# Altium PCB accessoryidk.PcbDoc
Units mm, origin at the board's own origin, x right, y up, seen from the top; angles counter-clockwise.
Board outline 96.5 x 79 mm, 4 copper layers (F.Cu, In1.Cu, In2.Cu, B.Cu); 81 components, 162 nets, 413 pads, 97 vias.
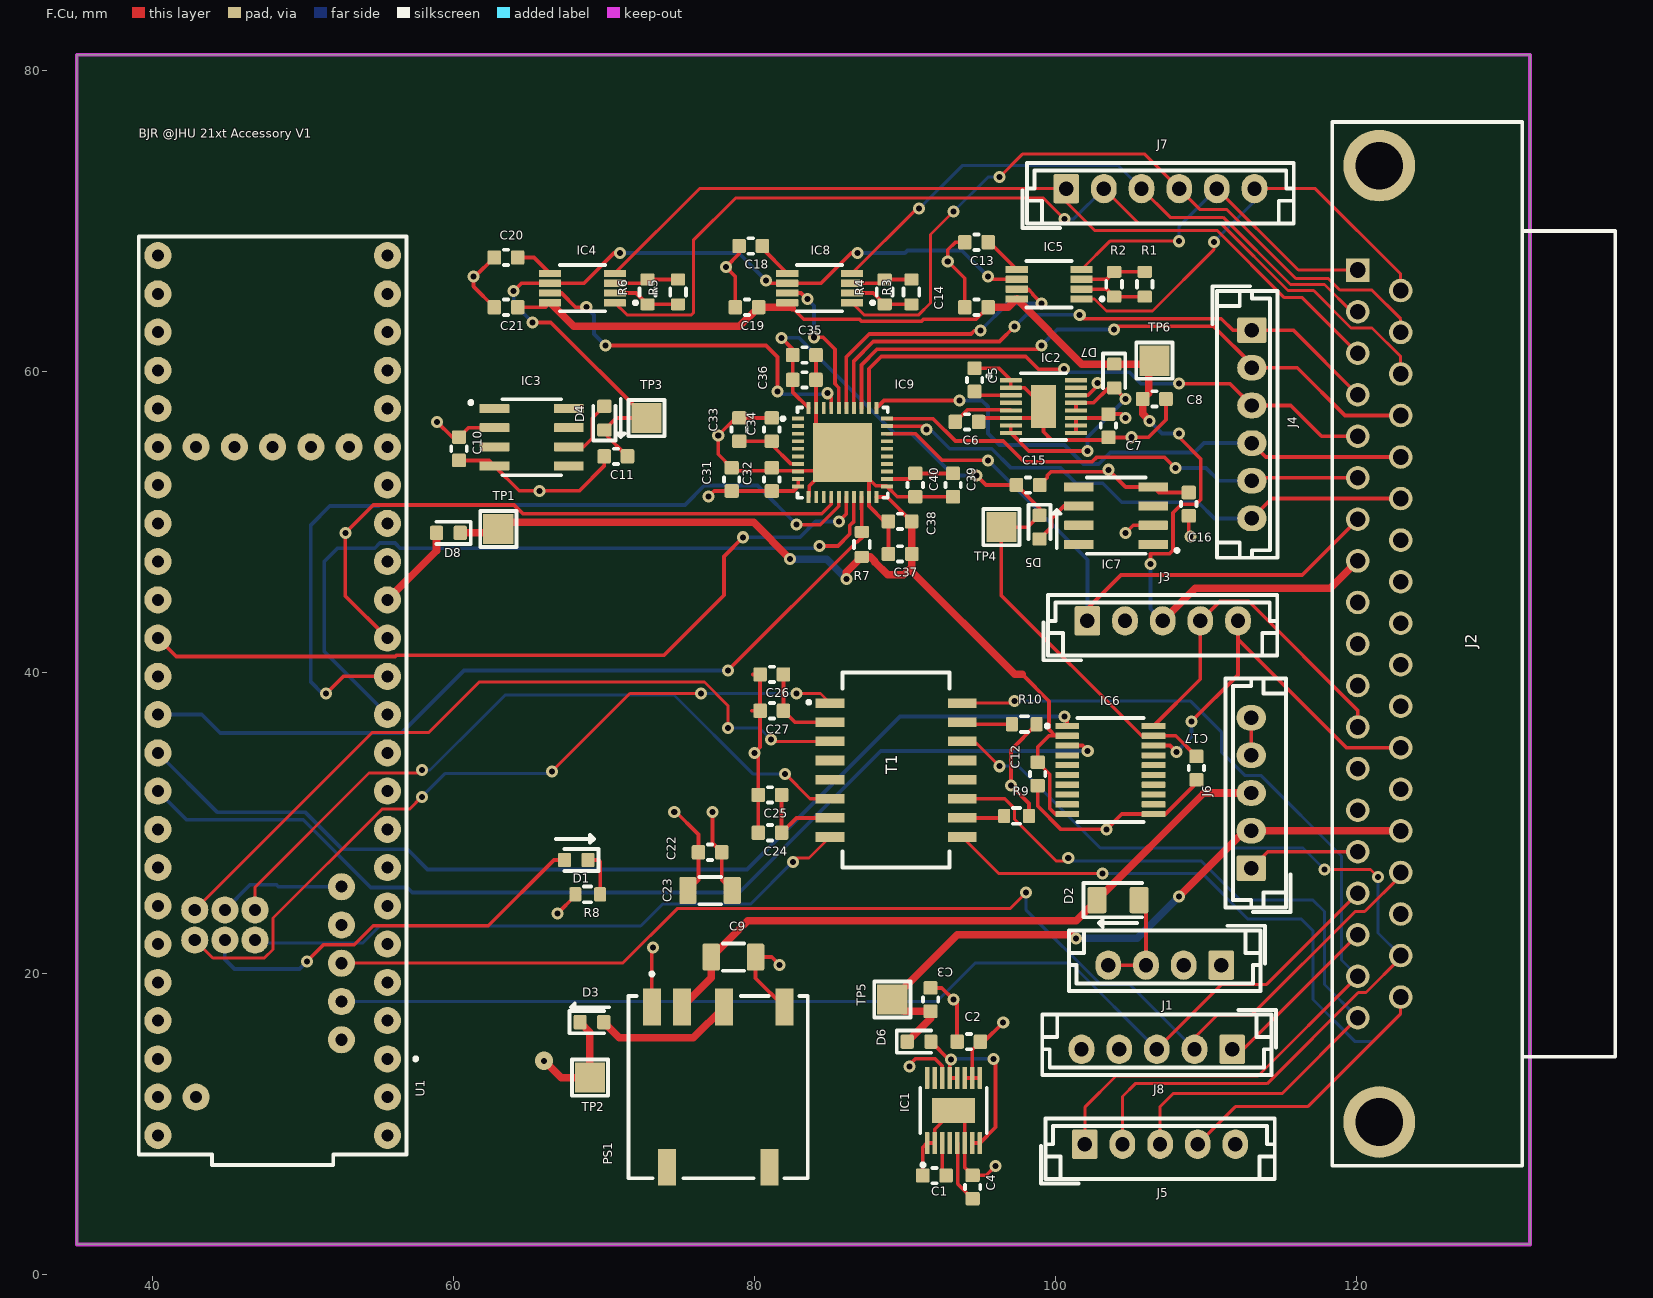
[diagram p0: F.Cu view]
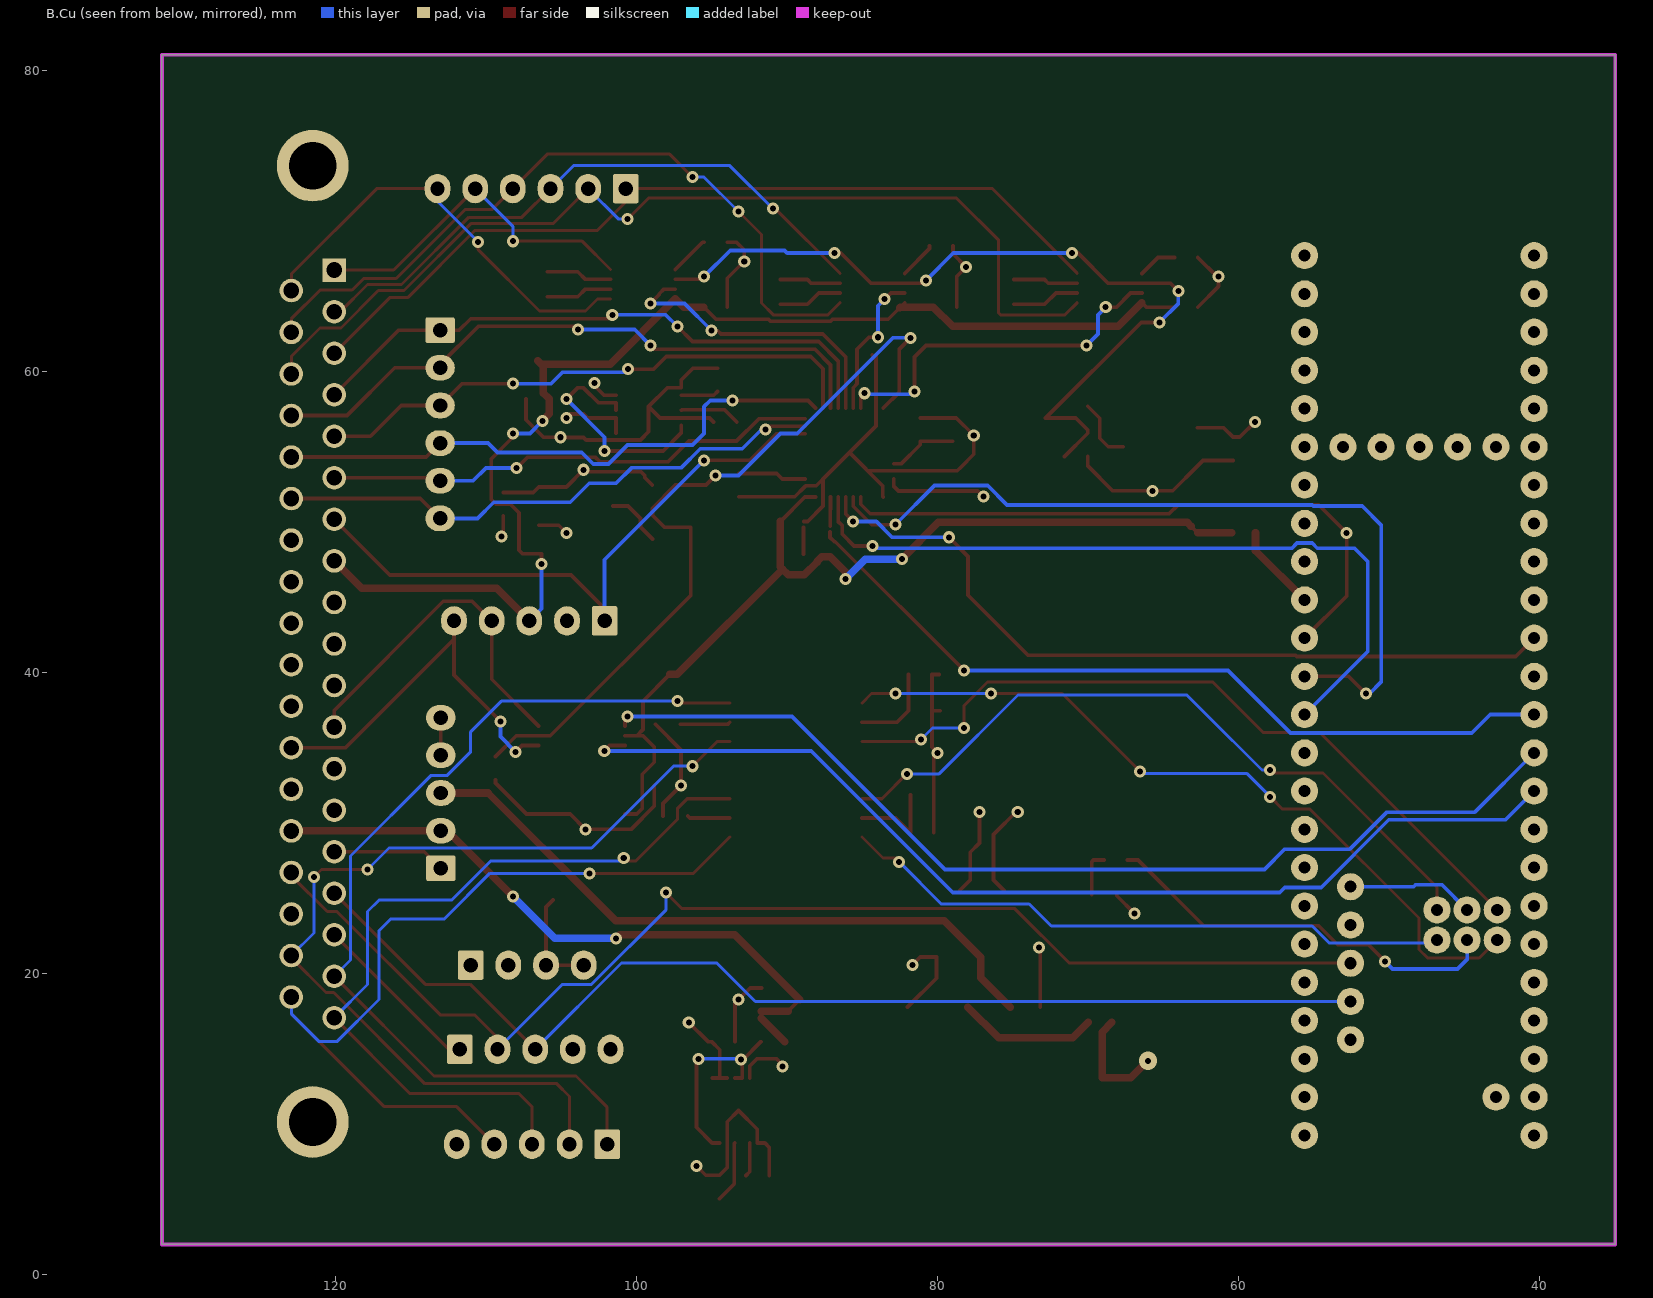
[diagram p1: B.Cu view, seen from below]
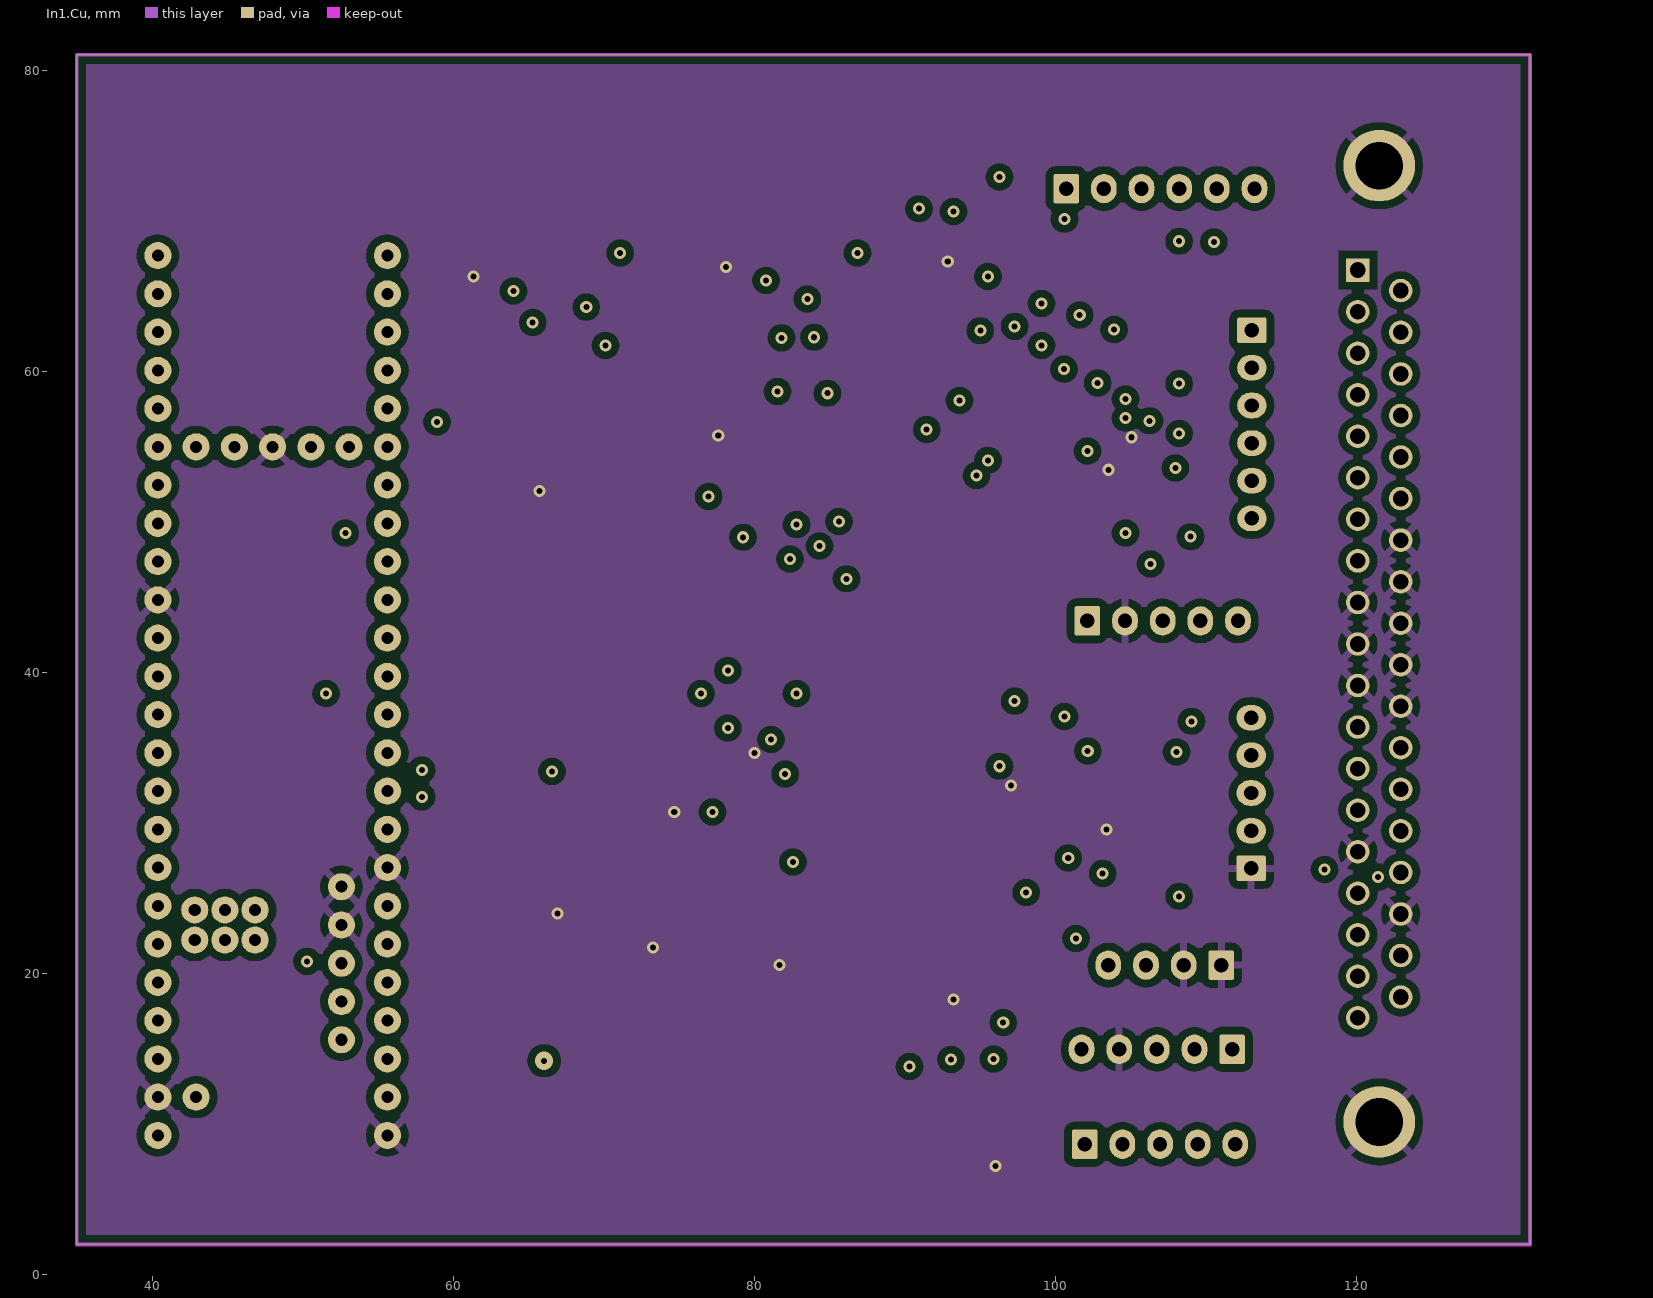
[diagram p2: In1.Cu]
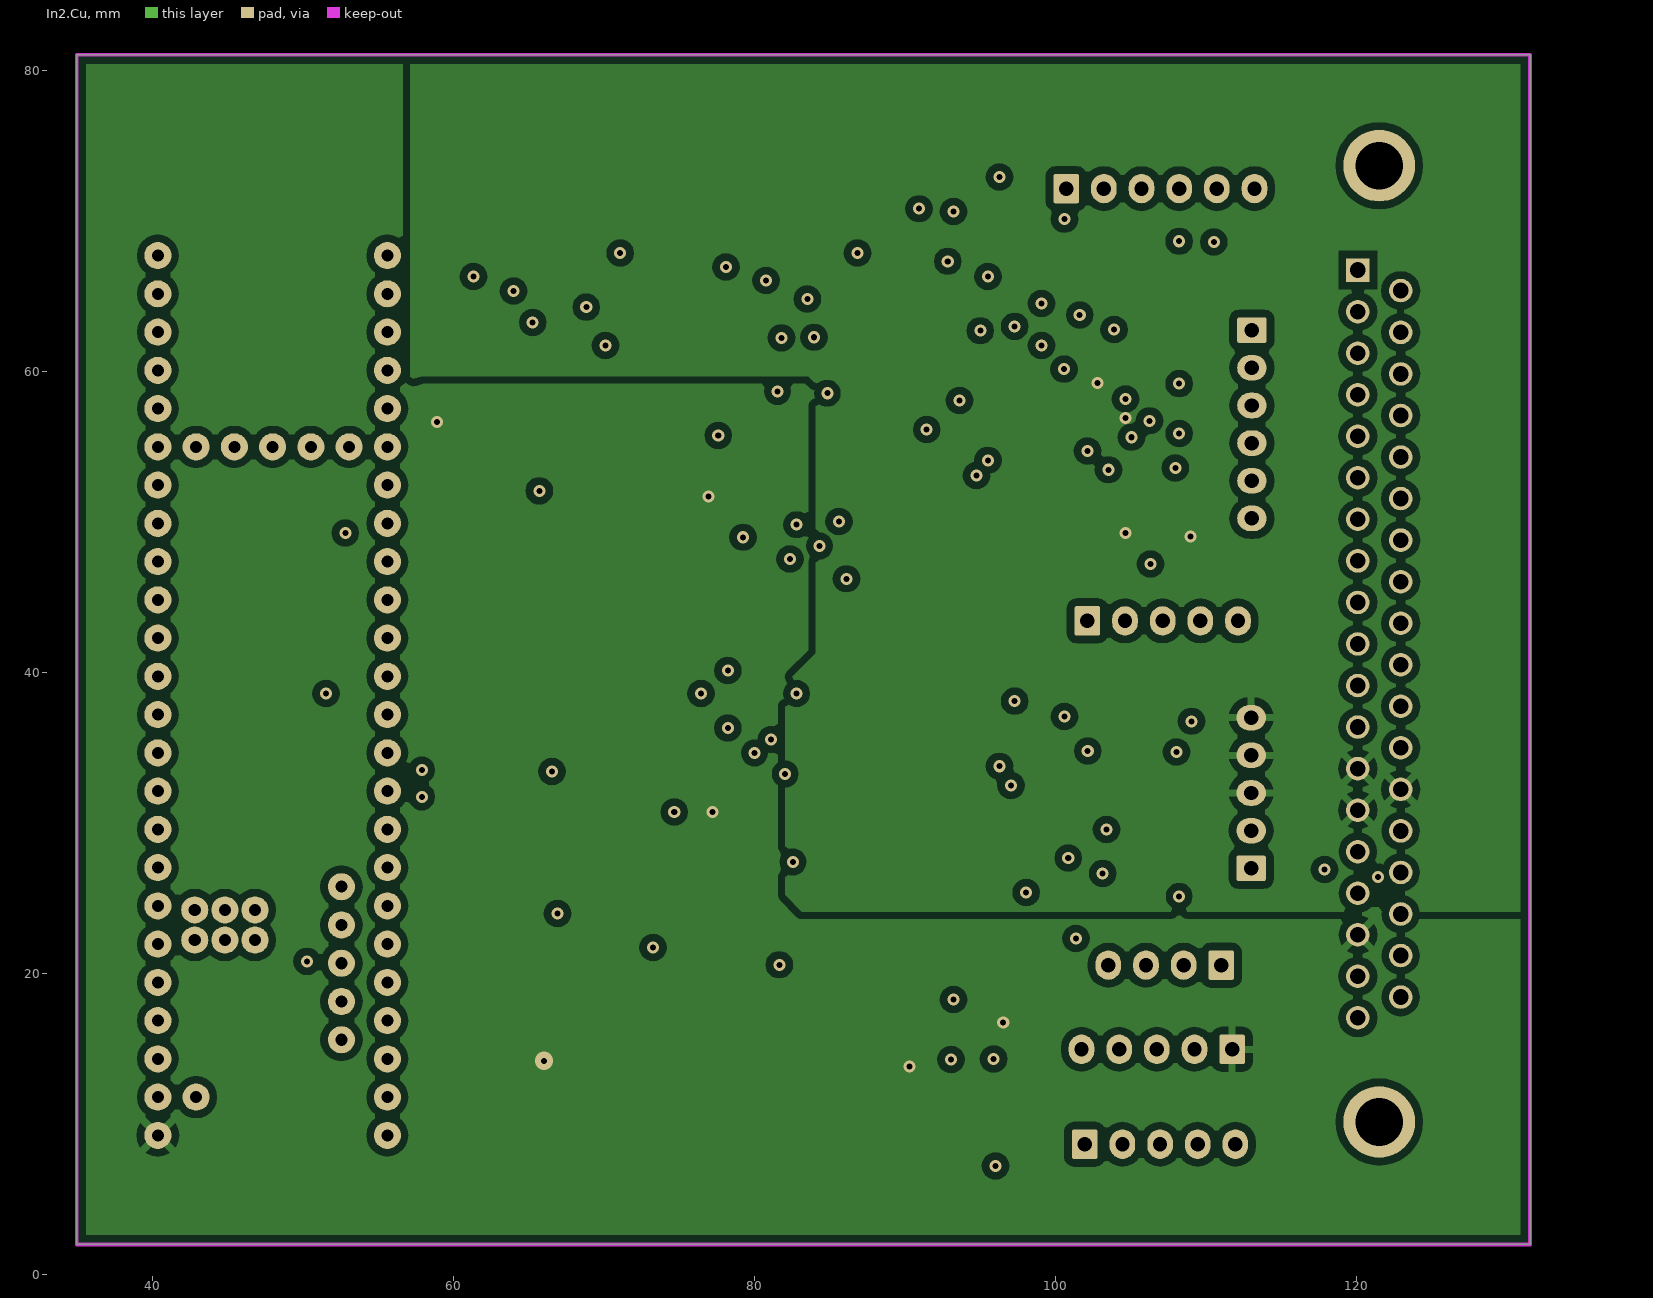
[diagram p3: In2.Cu]

## Layer stack, top to bottom
F.Mask: solder mask 0.0102, Solder Resist, Dk 3.5
F.Cu: signal copper 0.0356
Dielectric 1: dielectric 0.32, FR-4, Dk 4.8
In1.Cu: signal copper 0.0356
Dielectric2: dielectric 0.32, FR-4, Dk 4.8
In2.Cu: signal copper 0.0356
Dielectric3: dielectric 0.32, FR-4, Dk 4.8
B.Cu: signal copper 0.0356
B.Mask: solder mask 0.0102, Solder Resist, Dk 3.5

## Board outline
35,81.026 35,2.026 131.5,2.026 131.5,81.026 35,81.026

## Design rules (kind name [scope] priority, off if disabled: settings)
Clearance "Clearence 0.5_Polygon" [InNamedPolygon('In1.Cu-usb_gnd') OR InNamedPolygon('In2.Cu-5v_buck') OR InNamedPolygon('In2.Cu-12v')] p1: gap=0.5 ignorepadtopadclearanceinfootprint=FALSE
MinimumSolderMaskSliver [All] p1: minsoldermaskwidth=0
PolygonConnect Polygon_In2.Cu-12v_ConnectDirect [IsNamedPolygon('In2.Cu-12v') vs IsVia] p1: connectstyle=Direct reliefconductorwidth=0.254 reliefentries=4 polygonreliefangle="90 Angle" airgapwidth=0.254
PolygonConnect Polygon_In2.Cu-12v_ConnectRelief45 [IsNamedPolygon('In2.Cu-12v') vs (IsThruPin or IsSMTPin) and (PadShape_AllLayers = 'Round')] p2: connectstyle=Relief reliefconductorwidth=0.5 reliefentries=4 polygonreliefangle="45 Angle" airgapwidth=0.5
PolygonConnect Polygon_In2.Cu-12v_ConnectRelief90 [IsNamedPolygon('In2.Cu-12v') vs (IsThruPin or IsSMTPin) and (PadShape_AllLayers <> 'Round')] p3: connectstyle=Relief reliefconductorwidth=0.5 reliefentries=4 polygonreliefangle="90 Angle" airgapwidth=0.5
PolygonConnect Polygon_In2.Cu-5v_buck_ConnectDirect [IsNamedPolygon('In2.Cu-5v_buck') vs IsVia] p4: connectstyle=Direct reliefconductorwidth=0.254 reliefentries=4 polygonreliefangle="90 Angle" airgapwidth=0.254
PolygonConnect Polygon_In2.Cu-5v_buck_ConnectRelief45 [IsNamedPolygon('In2.Cu-5v_buck') vs (IsThruPin or IsSMTPin) and (PadShape_AllLayers = 'Round')] p5: connectstyle=Relief reliefconductorwidth=0.5 reliefentries=4 polygonreliefangle="45 Angle" airgapwidth=0.5
PolygonConnect Polygon_In2.Cu-5v_buck_ConnectRelief90 [IsNamedPolygon('In2.Cu-5v_buck') vs (IsThruPin or IsSMTPin) and (PadShape_AllLayers <> 'Round')] p6: connectstyle=Relief reliefconductorwidth=0.5 reliefentries=4 polygonreliefangle="90 Angle" airgapwidth=0.5
PolygonConnect Polygon_In1.Cu-usb_gnd_ConnectDirect [IsNamedPolygon('In1.Cu-usb_gnd') vs IsVia] p7: connectstyle=Direct reliefconductorwidth=0.254 reliefentries=4 polygonreliefangle="90 Angle" airgapwidth=0.254
PolygonConnect Polygon_In1.Cu-usb_gnd_ConnectRelief45 [IsNamedPolygon('In1.Cu-usb_gnd') vs (IsThruPin or IsSMTPin) and (PadShape_AllLayers = 'Round')] p8: connectstyle=Relief reliefconductorwidth=0.5 reliefentries=4 polygonreliefangle="45 Angle" airgapwidth=0.5
PolygonConnect Polygon_In1.Cu-usb_gnd_ConnectRelief90 [IsNamedPolygon('In1.Cu-usb_gnd') vs (IsThruPin or IsSMTPin) and (PadShape_AllLayers <> 'Round')] p9: connectstyle=Relief reliefconductorwidth=0.5 reliefentries=4 polygonreliefangle="90 Angle" airgapwidth=0.5
RoutingVias [All] p1: holewidth=0.711 width=1.27 viastyle="Through Hole" minholewidth=0.711 minwidth=1.27 maxholewidth=0.711 maxwidth=1.27
SilkToSilkClearance [All] p1: silktosilkclearance=0
SilkToSolderMaskClearance [IsPad] p1: minsilkscreentomaskgap=0 clearancetoexposedcopper=TRUE
SolderMaskExpansion [All] p1: expansion=0.102 istentingtop=FALSE
Width [All] p1: maxlimit=10 minlimit=0.254 preferedwidth=0.254 minimp=50.000000 maximp=50.000000 favimp=50.000000
27 further rules are at their usual default settings.

## Components (designator, comment, footprint, x,y, rotation, side; value= is the part's Value field where it differs from the comment)
C1 "1u" C_0603_1608Metric 91.948,6.604 r0 top
C2 "0.1u" C_0603_1608Metric 94.234,15.494 r0 top
C3 "1u" C_0603_1608Metric 91.694,18.288 r270 top
C4 "0.1u" C_0603_1608Metric 94.488,5.842 r270 top
C5 "1u" C_0603_1608Metric 94.614,59.44 r270 top
C6 "0.1u" C_0603_1608Metric 94.106,56.646 r180 top
C7 "0.1u" C_0603_1608Metric 103.504,56.392 r90 top
C8 "1u" C_0603_1608Metric 106.552,58.17 r180 top
C9 "10u" C_1206_3216Metric 78.605,21.107 r0 top
C10 "1u" C_0603_1608Metric 60.382,54.864 r270 top
C11 "10u" C_0603_1608Metric 70.796,54.356 r180 top
C12 "0.1u" C_0603_1608Metric 98.806,33.274 r270 top
C13 "1u" C_0603_1608Metric 94.742,68.58 r180 top
C14 "1u" C_0603_1608Metric 94.742,64.262 r180 top
C15 "22u" C_0603_1608Metric 98.171,52.451 r0 top
C16 "1u" C_0603_1608Metric 108.839,51.181 r90 top
C17 "0.1u" C_0603_1608Metric 109.347,33.655 r270 top
C18 "1u" C_0603_1608Metric 79.756,68.326 r180 top
C19 "1u" C_0603_1608Metric 79.502,64.262 r180 top
C20 "1u" C_0603_1608Metric 63.5,67.564 r180 top
C21 "1u" C_0603_1608Metric 63.5,64.262 r180 top
C22 "0.1u" C_0603_1608Metric 77.058,28.067 r0 top
C23 "100u" C_1206_3216Metric 77.058,25.527 r0 top
C24 "0.1u" C_0603_1608Metric 81.026,29.367 r180 top
C25 "0.1u" C_0603_1608Metric 81.026,31.877 r180 top
C26 "0.1u" C_0603_1608Metric 81.153,39.878 r180 top
C27 "0.1u" C_0603_1608Metric 81.153,37.465 r180 top
C31 "10u" C_0603_1608Metric 78.486,52.832 r90 top
C32 "0.1u" C_0603_1608Metric 81.153,52.832 r90 top
C33 "1u" C_0603_1608Metric 78.994,56.134 r270 top
C34 "0.1u" C_0603_1608Metric 81.153,56.134 r270 top
C35 "10u" C_0603_1608Metric 83.312,61.087 r0 top
C36 "0.1u" C_0603_1608Metric 83.312,59.436 r0 top
C37 "0.1u" C_0603_1608Metric 89.675,47.879 r180 top
C38 "10u" C_0603_1608Metric 89.662,50.038 r180 top
C39 "0.1u" C_0603_1608Metric 93.188,52.451 r270 top
C40 "1u" C_0603_1608Metric 90.678,52.451 r270 top
D1 "LED" D_0603_1608Metric 68.168,27.559 r180 top
D2 "D_Schottky" D_1206_3216Metric 104.14,24.892 r0 top
D3 "D_Schottky" D_0603_1608Metric 69.207,16.789 r0 top
D4 "D_Schottky" D_0603_1608Metric 70.034,56.896 r90 top
D5 "D_Schottky" D_0603_1608Metric 98.933,49.657 r270 top
D6 "D_Schottky" D_0603_1608Metric 90.932,15.494 r0 top
D7 "D_Schottky" D_0603_1608Metric 103.886,59.694 r270 top
D8 "D_Schottky" D_0603_1608Metric 59.677,49.276 r180 top
IC1 "LT6658AHMSE-2.5#PBF" SOP50P490X110-17N 93.218,10.922 r90 top
IC2 "LT6658AHMSE-5#PBF" SOP50P490X110-17N 99.186,57.662 r0 top
IC3 "REF5025AIDR" SOIC127P599X175-8N 65.208,55.626 r0 top
IC4 "INA821IDGKT" SOP65P490X110-8N 68.58,65.532 r180 top
IC5 "INA821IDGKT" SOP65P490X110-8N 99.568,65.786 r180 top
IC6 "TXB0108PWR" SOP65P640X120-20N 103.632,33.528 r0 top
IC7 "REF5050IDR" SOIC127P599X175-8N 104.013,50.419 r180 top
IC8 "INA821IDGKT" SOP65P490X110-8N 84.328,65.532 r180 top
IC9 "AD7175-8BCPZ-RL7" QFN50P600X600X80-41N 85.852,54.61 r0 top
J1 "Conn_01x04" JST_EH_B4B-EH-A_1x04_P2.50mm_Vertical 110.998,20.574 r180 top
J2 "5747847-6" 57478476 120.066,66.726 r90 top
J3 "Conn_01x05" JST_EH_B5B-EH-A_1x05_P2.50mm_Vertical 102.108,43.434 r0 top
J4 "Conn_01x06" JST_EH_B6B-EH-A_1x06_P2.50mm_Vertical 113.03,62.738 r270 top
J5 "Conn_01x05" JST_EH_B5B-EH-A_1x05_P2.50mm_Vertical 101.934,8.682 r0 top
J6 "Conn_01x05" JST_EH_B5B-EH-A_1x05_P2.50mm_Vertical 112.984,27.004 r90 top
J7 "Conn_01x06" JST_EH_B6B-EH-A_1x06_P2.50mm_Vertical 100.704,72.136 r0 top
J8 "Conn_01x05" JST_EH_B5B-EH-A_1x05_P2.50mm_Vertical 111.72,14.986 r180 top
PS1 "TRS_2-1211" CONV_TRS_2-2419 77.589,12.471 r90 top
R1 "249" R_0603_1608Metric 105.918,65.786 r90 top
R2 "R" R_0603_1608Metric 103.886,65.786 r90 top
R3 "R" R_0603_1608Metric 90.424,65.278 r90 top
R4 "249" R_0603_1608Metric 88.646,65.278 r90 top
R5 "R" R_0603_1608Metric 74.93,65.278 r90 top
R6 "249" R_0603_1608Metric 72.898,65.278 r90 top
R7 "10k" R_0603_1608Metric 87.135,48.514 r90 top
R8 "330" R_0603_1608Metric 68.93,25.273 r180 top
R9 "75" R_0603_1608Metric 97.409,30.48 r0 top
R10 "75" R_0603_1608Metric 97.917,36.576 r0 top
T1 "749013011" 749013011 89.408,33.528 r270 top
TP1 "TestPoint" TestPoint_Pad_2.0x2.0mm 62.992,49.53 r0 top
TP2 "TestPoint" TestPoint_Pad_2.0x2.0mm 69.08,13.106 r0 top
TP3 "TestPoint" TestPoint_Pad_2.0x2.0mm 72.828,56.896 r0 top
TP4 "TestPoint" TestPoint_Pad_2.0x2.0mm 96.393,49.657 r0 top
TP5 "TestPoint" TestPoint_Pad_2.0x2.0mm 89.154,18.288 r90 top
TP6 "TestPoint" TestPoint_Pad_2.0x2.0mm 106.552,60.71 r0 top
U1 "DEV-16771" MODULE_DEV-16771 48.006,38.481 r90 top

## Footprints (in the part's own frame and the unit in brackets; to place one, negate y for a bottom-side part, rotate by r counter-clockwise, add the part's x,y. Pads: shape width x height; smd on the part's side, far side on the other; paste and mask are expansions set on the pad)
57478476 [mil]
  rect 61.5x61.5 hole 41 paste-99999 mask+0: 1(0,0)
  round 61.5 hole 41 paste-99999 mask+0: 2(-108.62,0) 3(-217.2,0) 4(-325.83,0) 5(-434.41,0) 6(-543.03,0) 7(-651.61,0) 8(-760.2,0) 9(-868.82,0) 10(-977.4,0) 11(-1086.02,0) 12(-1194.61,0) 13(-1303.23,0) 14(-1411.81,0) 15(-1520.39,0) 16(-1629.02,0) 17(-1737.6,0) 18(-1846.22,0) 19(-1954.8,0) 20(-53.5,-112.01) 21(-162.91,-112.01) 22(-271.5,-112.01) 23(-380.12,-112.01) 24(-488.7,-112.01) 25(-597.32,-112.01) 26(-705.91,-112.01) 27(-814.53,-112.01) 28(-923.11,-112.01) 29(-1031.69,-112.01) 30(-1140.32,-112.01) 31(-1248.9,-112.01) 32(-1357.52,-112.01) 33(-1466.1,-112.01) 34(-1574.72,-112.01) 35(-1683.31,-112.01) 36(-1791.93,-112.01) 37(-1900.51,-112.01)
  round 187.48 hole 125 paste-99999 mask+0: MH1(272.99,-55.98) MH2(-2227.01,-55.98)
  silkscreen extent -2341,-673 387,67
749013011 [mm]
  rect 0.64x1.91 smd mask+0: 1(-4.445,-4.385) 2(-3.175,-4.385) 3(-1.905,-4.385) 4(-0.635,-4.385) 5(0.635,-4.385) 6(1.905,-4.385) 7(3.175,-4.385) 8(4.445,-4.385) 9(4.445,4.385) 10(3.175,4.385) 11(1.905,4.385) 12(0.635,4.385) 13(-0.635,4.385) 14(-1.905,4.385) 15(-3.175,4.385) 16(-4.445,4.385)
  silkscreen extent -6.48,-5.9 6.48,3.55
C_0603_1608Metric [mm]
  rrect25% 0.9x0.95 smd mask+0: 1(-0.775,0) 2(0.775,0)
  silkscreen extent -0.14,-0.51 0.14,0.51
C_1206_3216Metric [mm]
  rrect22% 1.15x1.8 smd mask+0: 1(-1.475,0) 2(1.475,0)
  silkscreen extent -0.71,-0.91 0.71,0.91
CONV_TRS_2-2419 [mm]
  rect 2.44x1.2 smd mask+0.102: 1(5.32,4.4) 2(5.32,2.4) 3(5.32,-0.4) 5(5.32,-4.4) 6(-5.32,3.4) 7(-5.32,-3.4)
  silkscreen extent -6.05,-5.95 7.62,5.95
D_0603_1608Metric [mm]
  rrect25% 0.875x0.95 smd mask+0: 1(-0.787,0) 2(0.787,0)
  silkscreen extent -1.49,-0.73 0.8,0.73
D_1206_3216Metric [mm]
  rrect20% 1.25x1.75 smd mask+0: 1(-1.4,0) 2(1.4,0)
  silkscreen extent -2.28,-1.13 1.6,1.13
JST_EH_B4B-EH-A_1x04_P2.50mm_Vertical [mm]
  rrect15% 1.7x1.95 hole 0.95 paste-2539.97 mask+0: 1(0,0)
  rrect100% 1.7x1.95 hole 0.95 paste-2539.97 mask+0: 2(2.5,0) 3(5,0) 4(7.5,0)
  silkscreen extent -2.91,-2.61 10.11,1.71
JST_EH_B5B-EH-A_1x05_P2.50mm_Vertical [mm]
  rrect15% 1.7x1.95 hole 0.95 paste-2539.97 mask+0: 1(0,0)
  rrect100% 1.7x1.95 hole 0.95 paste-2539.97 mask+0: 2(2.5,0) 3(5,0) 4(7.5,0) 5(10,0)
  silkscreen extent -2.91,-2.61 12.61,1.71
JST_EH_B6B-EH-A_1x06_P2.50mm_Vertical [mm]
  rrect15% 1.7x1.95 hole 0.95 paste-2539.97 mask+0: 1(0,0)
  rrect100% 1.7x1.95 hole 0.95 paste-2539.97 mask+0: 2(2.5,0) 3(5,0) 4(7.5,0) 5(10,0) 6(12.5,0)
  silkscreen extent -2.91,-2.61 15.11,1.71
MODULE_DEV-16771 [mm]
  round 1.8 hole 0.8 paste-2539.97 mask+0.102: 0(-26.67,-7.62) 1(-24.13,-7.62) 2(-21.59,-7.62) 3(-19.05,-7.62) 3.3V_1(6.35,-7.62) 3.3V_2(-24.13,7.62) 3.3V_3(16.51,-2.54) 4(-16.51,-7.62) 5(-13.97,-7.62) 5V(-22.86,-4.57) 6(-11.43,-7.62) 7(-8.89,-7.62) 8(-6.35,-7.62) 9(-3.81,-7.62) 10(-1.27,-7.62) 11(1.27,-7.62) 12(3.81,-7.62) 13(3.81,7.62) 14(1.27,7.62) 15(-1.27,7.62) 16(-3.81,7.62) 17(-6.35,7.62) 18(-8.89,7.62) 19(-11.43,7.62) 20(-13.97,7.62) 21(-16.51,7.62) 22(-19.05,7.62) 23(-21.59,7.62) 24(8.89,-7.62) 25(11.43,-7.62) 26(13.97,-7.62) 27(16.51,-7.62) 28(19.05,-7.62) 29(21.59,-7.62) 30(24.13,-7.62) 31(26.67,-7.62) 32(29.21,-7.62) 33(29.21,7.62) 34(26.67,7.62) 35(24.13,7.62) 36(21.59,7.62) 37(19.05,7.62) 38(16.51,7.62) 39(13.97,7.62) 40(11.43,7.62) 41(8.89,7.62) D+(-17.78,-4.57) D-(-20.32,-4.57) GND1(-29.21,-7.62) GND2(6.35,7.62) GND3(-26.67,7.62) GND4(16.51,0) GND5(-14.24,3.17) LED(-16.24,3.17) ON/OFF(16.51,5.08) PROGRAM(16.51,2.54) R+(-16.24,5.17) R-(-14.24,5.17) T+(-14.24,1.17) T-(-16.24,1.17) USB_GND1(-15.24,-4.57) USB_GND2(-12.7,-4.57) VBAT(16.51,-5.08) VIN(-29.21,7.62) VUSB(-26.67,5.08)
  silkscreen extent -31.18,-9.6 30.48,8.89
QFN50P600X600X80-41N [mm]
  rrect12% 0.81x0.26 smd mask+0.102: 1(-2.95,2.25) 2(-2.95,1.75) 3(-2.95,1.25) 4(-2.95,0.75) 5(-2.95,0.25) 6(-2.95,-0.25) 7(-2.95,-0.75) 8(-2.95,-1.25) 9(-2.95,-1.75) 10(-2.95,-2.25) 21(2.95,-2.25) 22(2.95,-1.75) 23(2.95,-1.25) 24(2.95,-0.75) 25(2.95,-0.25) 26(2.95,0.25) 27(2.95,0.75) 28(2.95,1.25) 29(2.95,1.75) 30(2.95,2.25)
  rrect12% 0.26x0.81 smd mask+0.102: 11(-2.25,-2.95) 12(-1.75,-2.95) 13(-1.25,-2.95) 14(-0.75,-2.95) 15(-0.25,-2.95) 16(0.25,-2.95) 17(0.75,-2.95) 18(1.25,-2.95) 19(1.75,-2.95) 20(2.25,-2.95) 31(2.25,2.95) 32(1.75,2.95) 33(1.25,2.95) 34(0.75,2.95) 35(0.25,2.95) 36(-0.25,2.95) 37(-0.75,2.95) 38(-1.25,2.95) 39(-1.75,2.95) 40(-2.25,2.95)
  rect 3.9x3.9 smd paste-3.9 mask+0.102: 41(0,0)
  silkscreen extent -4.06,-3 3,3
R_0603_1608Metric [mm]
  rrect25% 0.8x0.95 smd mask+0: 1(-0.825,0) 2(0.825,0)
  silkscreen extent -0.24,-0.52 0.24,0.52
SOIC127P599X175-8N [mm]
  rrect12% 1.97x0.6 smd mask+0.102: 1(-2.47,1.905) 2(-2.47,0.635) 3(-2.47,-0.635) 4(-2.47,-1.905) 5(2.47,-1.905) 6(2.47,-0.635) 7(2.47,0.635) 8(2.47,1.905)
  silkscreen extent -4.14,-2.52 1.95,2.52
SOP50P490X110-17N [mm]
  rrect12% 1.45x0.28 smd mask+0.102: 1(-2.16,1.75) 2(-2.16,1.25) 3(-2.16,0.75) 4(-2.16,0.25) 5(-2.16,-0.25) 6(-2.16,-0.75) 7(-2.16,-1.25) 8(-2.16,-1.75) 9(2.16,-1.75) 10(2.16,-1.25) 11(2.16,-0.75) 12(2.16,-0.25) 13(2.16,0.25) 14(2.16,0.75) 15(2.16,1.25) 16(2.16,1.75)
  rect 1.651x2.845 smd paste-2.845 mask+0.102: 17(0,0)
  silkscreen extent -3.71,-2.21 1.5,2.21
SOP65P490X110-8N [mm]
  rrect12% 1.47x0.48 smd mask+0.102: 1(-2.15,0.975) 2(-2.15,0.325) 3(-2.15,-0.325) 4(-2.15,-0.975) 5(2.15,-0.975) 6(2.15,-0.325) 7(2.15,0.325) 8(2.15,0.975)
  silkscreen extent -3.62,-1.54 1.5,1.54
SOP65P640X120-20N [mm]
  rrect12% 1.57x0.41 smd mask+0.102: 1(-2.87,2.925) 2(-2.87,2.275) 3(-2.87,1.625) 4(-2.87,0.975) 5(-2.87,0.325) 6(-2.87,-0.325) 7(-2.87,-0.975) 8(-2.87,-1.625) 9(-2.87,-2.275) 10(-2.87,-2.925) 11(2.87,-2.925) 12(2.87,-2.275) 13(2.87,-1.625) 14(2.87,-0.975) 15(2.87,-0.325) 16(2.87,0.325) 17(2.87,0.975) 18(2.87,1.625) 19(2.87,2.275) 20(2.87,2.925)
  silkscreen extent -4.29,-3.45 2.2,3.45
TestPoint_Pad_2.0x2.0mm [mm]
  rect 2x2 smd paste-2 mask+0: 1(0,0)
  silkscreen extent -1.2,-1.2 1.2,1.2

## Part data
C1 C2 C3 C4 C5 C6 C7 C8 C10 C11 C12 C13 C14 C15 C16 C17 C18 C19 C20 C21 C22 C24 C25 C26 C27 C31 C32 C33 C34 C35 C36 C37 C38 C39 C40: library part C_0603_1608Metric, "Capacitor SMD 0603 (1608 Metric), square (rectangular) end terminal, IPC_7351 nominal, (Body size source: IPC-SM-782 page 76, https://www.pcb-3d.com/wordpress/wp-content/uploads/ipc-sm-782a_amendment_1_and_2.pdf), generated with kicad-footprint-generator", ki_description="Unpolarized capacitor", ki_keywords="cap capacitor"
  C1 C2 C3 C4 C5 C6 C7 C8 C10 C11 C15 C16: Sheetfile=accessoryidk.kicad_sch
  C12 C13 C14 C17 C18 C19 C20 C21: Sheetfile=sensor_input.kicad_sch, Sheetname="input, processing"
  C22 C24 C25 C26 C27: Sheetfile=teensy.kicad_sch, Sheetname="teensy, etc"
  C31 C32 C33 C34 C35 C36 C37 C38 C39 C40: Sheetfile=AD7175-8.kicad_sch, Sheetname=ADC
C9 C23: library part C_1206_3216Metric, "Capacitor SMD 1206 (3216 Metric), square (rectangular) end terminal, IPC_7351 nominal, (Body size source: IPC-SM-782 page 76, https://www.pcb-3d.com/wordpress/wp-content/uploads/ipc-sm-782a_amendment_1_and_2.pdf), generated with kicad-footprint-generator", ki_description="Unpolarized capacitor", ki_keywords="cap capacitor"
  C9: Sheetfile=accessoryidk.kicad_sch
  C23: Sheetfile=teensy.kicad_sch, Sheetname="teensy, etc"
D1 D3 D4 D5 D6 D7 D8: library part D_0603_1608Metric, "Diode SMD 0603 (1608 Metric), square (rectangular) end terminal, IPC_7351 nominal, (Body size source: http://www.tortai-tech.com/upload/download/2011102023233369053.pdf), generated with kicad-footprint-generator"
  D1: Sheetfile=teensy.kicad_sch, Sheetname="teensy, etc", ki_description="Light emitting diode", ki_keywords="LED diode"
  D3 D4 D5 D6 D7: Sheetfile=accessoryidk.kicad_sch, ki_description="Schottky diode", ki_keywords="diode Schottky"
  D8: Sheetfile=teensy.kicad_sch, Sheetname="teensy, etc", ki_description="Schottky diode", ki_keywords="diode Schottky"
D2: library part D_1206_3216Metric, "Diode SMD 1206 (3216 Metric), square (rectangular) end terminal, IPC_7351 nominal, (Body size source: http://www.tortai-tech.com/upload/download/2011102023233369053.pdf), generated with kicad-footprint-generator", Sheetfile=accessoryidk.kicad_sch, ki_description="Schottky diode", ki_keywords="diode Schottky"
IC1 IC2: library part SOP50P490X110-17N, Manufacturer_Name="Analog Devices", Mouser Part Number=584-LT6658AHMSE5PBF, Height=1.1, Mouser Price/Stock=https://www.mouser.co.uk/ProductDetail/Analog-Devices/LT6658AHMSE-5PBF?qs=W0yvOO0ixfFdSUQ4xUcBUw%3D%3D, Sheetfile=accessoryidk.kicad_sch
  IC1: Manufacturer_Part_Number=LT6658AHMSE-2.5#PBF, ki_description="2.5v refulator for Aux"
  IC2: Manufacturer_Part_Number=LT6658AHMSE-5#PBF, ki_description="5v refulator for Aux"
IC3: library part SOIC127P599X175-8N, Manufacturer_Name="Texas Instruments", Manufacturer_Part_Number=REF5050IDR, Mouser Part Number=595-REF5050IDR, Height=1.75, Mouser Price/Stock=https://www.mouser.co.uk/ProductDetail/Texas-Instruments/REF5050IDR?qs=xL7PkI2RoJ6ioxG%2FxfIGUw%3D%3D, Sheetfile=accessoryidk.kicad_sch, ki_description="5v ref for Aux"
IC4 IC5 IC8: library part SOP65P490X110-8N, Manufacturer_Name="Texas Instruments", Mouser Part Number=595-INA821IDGKT, Height=1.1, Manufacturer_Part_Number=INA821IDGKT, Mouser Price/Stock=https://www.mouser.co.uk/ProductDetail/Texas-Instruments/INA821IDGKT?qs=LDGDZb5k%2F%252B8diOW5CeiHfQ%3D%3D, Sheetfile=sensor_input.kicad_sch, Sheetname="input, processing", ki_description="Inst. Amp for Main, wsg"
IC6: library part SOP65P640X120-20N, Manufacturer_Name="Texas Instruments", Mouser Part Number=595-TXB0108PWR, Height=1.2, Manufacturer_Part_Number=TXB0108PWR, Mouser Price/Stock=https://www.mouser.co.uk/ProductDetail/Texas-Instruments/TXB0108PWR?qs=oFXvjAmG9EgEUWGWzOVFCA%3D%3D, Sheetfile=sensor_input.kicad_sch, Sheetname="input, processing", ki_description="Level shifter for Main"
IC7: library part SOIC127P599X175-8N, Manufacturer_Name="Texas Instruments", Mouser Part Number=595-REF5050IDR, Height=1.75, Manufacturer_Part_Number=REF5050IDR, Mouser Price/Stock=https://www.mouser.co.uk/ProductDetail/Texas-Instruments/REF5050IDR?qs=xL7PkI2RoJ6ioxG%2FxfIGUw%3D%3D, Sheetfile=accessoryidk.kicad_sch, ki_description="5v ref for Aux"
IC9: library part QFN50P600X600X80-41N, Manufacturer_Name="Analog Devices", Mouser Part Number=584-AD7175-8BCPZ-RL7, Height=0.8, Manufacturer_Part_Number=AD7175-8BCPZ-RL7, Mouser Price/Stock=https://www.mouser.co.uk/ProductDetail/Analog-Devices/AD7175-8BCPZ-RL7?qs=JeIcUl65ClCxXjl02vXI6Q%3D%3D, Sheetfile=AD7175-8.kicad_sch, Sheetname=ADC, ki_description="8-channel ADC for Main, Aux"
J1: library part JST_EH_B4B-EH-A_1x04_P2.50mm_Vertical, "JST EH series connector, B4B-EH-A (http://www.jst-mfg.com/product/pdf/eng/eEH.pdf), generated with kicad-footprint-generator", Sheetfile=accessoryidk.kicad_sch, ki_description="Generic connector, single row, 01x04, script generated (kicad-library-utils/schlib/autogen/connector/)", ki_keywords=connector
J2: library part 57478476, "5747847-6_1", Manufacturer_Name="TE Connectivity", Mouser Part Number=571-5747847-6, Arrow Part Number=5747847-6, Arrow Price/Stock=https://www.arrow.com/en/products/5747847-6/te-connectivity?region=nac, Height=12.9286, Manufacturer_Part_Number=5747847-6, Mouser Price/Stock=https://www.mouser.co.uk/ProductDetail/TE-Connectivity/5747847-6?qs=DUjmvCJSYRDRvMVFkAFvlQ%3D%3D, Sheetfile=sensor_input.kicad_sch, Sheetname="input, processing", ki_description="Body Features: Mating Feature Material Zinc | Assembly Process Feature Material Copper Alloy | Shell Plating Material Tin over Copper | Connector Profile Standard | Primary Product Color Black | Mating Feature Plating Material Clear Chromate | Configuration Features: Number of Rows 2 | PCB Mount Orientation Right Angle | Number of Positions 37 | Contact Features: Contact Mating Area Plating Material Gold | PCB Contact Termination Area Plating Material Tin | Contact Base Material Phosphor Bronze | Contact Ma"
J3 J5 J6 J8: library part JST_EH_B5B-EH-A_1x05_P2.50mm_Vertical, "JST EH series connector, B5B-EH-A (http://www.jst-mfg.com/product/pdf/eng/eEH.pdf), generated with kicad-footprint-generator", Sheetfile=sensor_input.kicad_sch, Sheetname="input, processing", ki_description="Generic connector, single row, 01x05, script generated (kicad-library-utils/schlib/autogen/connector/)", ki_keywords=connector
J4 J7: library part JST_EH_B6B-EH-A_1x06_P2.50mm_Vertical, "JST EH series connector, B6B-EH-A (http://www.jst-mfg.com/product/pdf/eng/eEH.pdf), generated with kicad-footprint-generator", Sheetfile=sensor_input.kicad_sch, Sheetname="input, processing", ki_description="Generic connector, single row, 01x06, script generated (kicad-library-utils/schlib/autogen/connector/)", ki_keywords=connector
PS1: library part CONV_TRS_2-2419, Manufacturer_Name="Traco Power", Manufacturer_Part_Number="TRS 2-1211", Mouser Part Number=495-TRS2-1211, Height=8, Mouser Price/Stock=https://www.mouser.co.uk/ProductDetail/TRACO-Power/TRS-2-1211?qs=wUXugUrL1qziI%252BEzex2I6g%3D%3D, Sheetfile=accessoryidk.kicad_sch, ki_description="Buck converter 5v for Aux"
R1 R2 R3 R4 R5 R6 R7 R8 R9 R10: library part R_0603_1608Metric, "Resistor SMD 0603 (1608 Metric), square (rectangular) end terminal, IPC_7351 nominal, (Body size source: IPC-SM-782 page 72, https://www.pcb-3d.com/wordpress/wp-content/uploads/ipc-sm-782a_amendment_1_and_2.pdf), generated with kicad-footprint-generator", ki_description=Resistor, ki_keywords="R res resistor"
  R1 R2 R3 R4 R5 R6: Sheetfile=sensor_input.kicad_sch, Sheetname="input, processing"
  R7: Sheetfile=AD7175-8.kicad_sch, Sheetname=ADC
  R8 R9 R10: Sheetfile=teensy.kicad_sch, Sheetname="teensy, etc"
T1: "749013011-3", Manufacturer_Name="Wurth Elektronik", Mouser Part Number=710-749013011, Height=5.33, Manufacturer_Part_Number=749013011, Mouser Price/Stock=https://www.mouser.co.uk/ProductDetail/Wurth-Elektronik/749013011?qs=2sV1BwmkawRYxGj1O9AWzA%3D%3D, Sheetfile=teensy.kicad_sch, Sheetname="teensy, etc", ki_description="Eth. Magnetics for Main, Aux"
TP1 TP2 TP3 TP4 TP5 TP6: library part TestPoint_Pad_2.0x2.0mm, "SMD rectangular pad as test Point, square 2.0mm side length", ki_description="test point", ki_keywords="test point tp"
  TP1: Sheetfile=teensy.kicad_sch, Sheetname="teensy, etc"
  TP2 TP3 TP4 TP5 TP6: Sheetfile=accessoryidk.kicad_sch
U1: library part MODULE_DEV-16771, "teensy 4.1 for Aux", MANUFACTURER="SparkFun Electronics", MAXIMUM_PACKAGE_HEIGHT=4.07mm, PARTREV=4.1, STANDARD="Manufacturer recommendations", Sheetfile=teensy.kicad_sch, Sheetname="teensy, etc", ki_description="teensy 4.1 for Aux"

## Via types
v1: diameter 0.8, hole 0.4, F.Cu to B.Cu, tented both sides, 96 vias
v2: diameter 1.2, hole 0.4, F.Cu to B.Cu, tented both sides, 1 vias

## Nets (pads, with @x,y where several pads share a name; then routed paths per layer and width w, separated by ;. In a path a pad name is that pad's centre, name@x,y a point inside that pad or via, vN(x,y) a via of type N, cw(c..) or ccw(c..) an arc to the next point about the centre after c; other vN are vias at no path point)
2.5v: C3.2 D6.1 J2.33 J6.2 TP5.1 | length 44.1
  F.Cu w0.25: TP5.1 TP5.1@89.929,17.513 ; 91.694,17.043 C3.2 ; J6.2 J6.2@113.001,29.487
  F.Cu w0.5: TP5.1 93.472,22.606 101.092,22.606 v1(101.346,22.352) ; TP5.1@89.929,17.513 C3.2 ; D6.1 91.694,17.043 ; v1(108.204,25.146) 112.562,29.504 J6.2 ; J6.2@113.001,29.487 J2.33
  B.Cu w0.5: v1(101.346,22.352) 105.41,22.352 v1(108.204,25.146)
2.5v_ref: C11.1 D4.1 IC4.6 IC5.6 IC8.6 TP3.1 | length 55.3
  F.Cu w0.25: v1(64.011,65.337) 64.531,65.857 IC4.6 68.679,65.857 70.674,67.852 v1(71.086,67.852) ; v1(65.278,63.246) 66.478,63.246 TP3.1 70.821,56.896 D4.1 70.034,55.893 C11.1 ; v1(80.772,66.04) 80.955,65.857 IC8.6 84.427,65.857 86.422,67.852 v1(86.834,67.852) ; v1(95.504,66.294) 95.687,66.111 IC5.6
  B.Cu w0.25: v1(64.011,65.337) 64.011,64.513 v1(65.278,63.246) ; v1(71.086,67.852) 78.96,67.852 v1(80.772,66.04) ; v1(86.834,67.852) 89.987,67.852 90.17,68.035 93.763,68.035 v1(95.504,66.294)
3V3: C12.1 C37.1 C38.1 D8.1 IC6.2 IC6.10 IC9.20 R7.1 TP1.1 | length 62.8
  F.Cu w0.25: TP1.1@62.738,49.276 TP1.1 TP1.1@63.172,49.71 ; IC9.20 88.815,51.66 C38.1 ; 97.79,39.878 99.568,38.1 99.568,36.212 IC6.2@99.977,35.803 ; IC6.10 99.977,30.603 99.606,30.974 99.606,33.249 C12.1 98.806,35.052 99.557,35.803 IC6.2@99.977,35.803 ; IC6.2 IC6.2@99.977,35.803
  F.Cu w0.5: D8.1 TP1.1@62.738,49.276 ; TP1.1@63.172,49.71 63.433,49.971 79.95,49.971 82.357,47.564 v1(82.357,47.535) ; v1(86.106,46.228) 86.106,46.66 R7.1 87.693,47.689 88,47.382 88,47.343 88.861,46.482 89.916,46.482 90.297,46.863 ; C38.1 90.45,50.025 C37.1 90.45,47.016 90.297,46.863 ; 97.79,39.878 97.282,39.878 90.297,46.863
  B.Cu w0.5: v1(82.357,47.535) 84.799,47.535 v1(86.106,46.228)
5v_buck: C2.2 C10.1 C22.2 C23.2 C31.1 C32.1 D3.1 IC1.9 IC1.10 IC1.11 IC1.14 IC3.2 IC9.9 IC9.10 J2.17 J8.1 TP2.1 U1.VIN | length 45.3
  F.Cu w0.25: v1(58.928,56.642) 59.931,55.639 C10.1 61.004,56.261 IC3.2 ; v1(76.962,51.689) 77.33,52.057 C31.1 C32.1 82.599,52.057 IC9.10 IC9.9 ; v1(77.216,30.734) 77.216,30.861 77.216,28.684 C22.2 77.833,26.227 C23.2 ; v1(90.297,13.843) 90.297,13.97 90.678,14.351 92.004,14.351 92.468,13.887 IC1.14 ; IC1.11 IC1.9 ; IC1.10 94.468,14.953 C2.2 95.25,15.494 v1(96.52,16.764) ; J8.1 112.461,14.986 J2.17
  F.Cu w0.5: v2(66.04,14.224) 67.158,13.106 TP2.1 69.08,16.128 D3.1
5v_ref: C15.1 C17.1 C35.1 C36.1 D5.1 IC6.19 IC9.40 TP4.1 | length 52.5
  F.Cu w0.25: v1(81.788,62.23) 82.537,61.481 C35.1 82.537,58.625 IC9.40 ; v1(94.742,53.086) 95.377,52.451 C15.1 98.933,50.914 D5.1 98.146,49.657 TP4.1 96.393,45.127 105.717,35.803 IC6.19 107.974,35.803 C17.1
  B.Cu w0.25: v1(81.788,62.23) 82.804,62.23 82.965,62.23 89.315,55.88 90.424,55.88 93.218,53.086 v1(94.742,53.086)
5v_reful: C8.2 C14.1 C19.1 C21.1 D7.1 IC4.8 IC5.8 IC8.8 J2.8 J3.3 TP6.1 | length 84.5
  F.Cu w0.25: C21.1 66.135,64.262 IC4.8 ; IC8.8 83.273,63.462 86.972,63.462 87.106,63.328 91.088,63.328 91.222,63.462 94.717,63.462 C14.1 C14.1@95.517,64.148 ; v1(106.299,47.207) 106.299,47.889 107.561,47.889 107.793,48.121 107.793,50.619 108.355,51.181 109.323,51.181 109.639,51.497 109.639,54.191 108.204,55.626 v1(108.204,55.88) ; TP6.1@106.324,60.481 TP6.1
  F.Cu w0.5: IC4.8 67.995,62.992 79.007,62.992 C19.1 82.473,64.262 82.512,64.224 ; C14.1 96.869,64.262 IC5.8 101.748,60.481 103.504,60.481 TP6.1@106.324,60.481 ; v1(106.231,56.719) 105.777,57.173 C8.2 106.172,58.565 106.172,60.33 TP6.1 ; J3.3 109.267,45.593 118.242,45.593 J2.8
  B.Cu w0.25: v1(106.231,56.719) 107.07,55.88 v1(108.204,55.88) ; v1(106.299,47.207) 106.299,44.243 J3.3
12v: C7.2 C9.1 C16.1 D2.1 IC2.9 IC2.10 IC2.11 IC2.14 IC7.2 J2.13 J2.14 J2.32 J6.3 J6.4 J6.5 PS1.2 | length 56.9
  F.Cu w0.25: IC2.9 IC2.11 103.249,56.912 C7.2 104.372,57.167 v1(104.648,56.891) ; IC2.14 102.151,58.412 102.792,59.053 v1(102.792,59.22) ; v1(104.648,49.276) 105.156,49.784 IC7.2 ; C16.1 108.839,49.149 v1(108.966,49.022) ; J6.4 J6.5
  F.Cu w0.5: PS1.2 77.13,19.731 C9.1 79.555,23.532 101.38,23.532 D2.1 109.852,32.004 J6.3
!CS: IC9.17 U1.10 | length 50
  F.Cu w0.25: v1(84.328,48.414) 85.553,48.414 86.335,49.196 86.335,49.762 86.602,50.029 IC9.17
  B.Cu w0.25: U1.10@55.308,37.529 51.435,41.402 51.435,47.371 52.324,48.26 54.783,48.26 55.119,48.596 56.133,48.596 56.469,48.26 84.174,48.26 v1(84.328,48.414)
!ERROR: IC9.18 R7.2 U1.15 | length 55
  F.Cu w0.25: v1(78.232,40.132) 86.788,48.688 86.853,48.688 87.135,48.97 R7.2 ; IC9.18 87.102,50.843 87.122,50.823 R7.2@87.122,49.72
  B.Cu w0.25: U1.15 43.307,37.211 44.532,35.986 56.56,35.986 60.706,40.132 v1(78.232,40.132) v1@78.297,40.132
brakespeed1: IC9.29 J2.25 J4.6 | length 37.5
  F.Cu w0.25: IC9.29 91.215,56.36 v1(91.44,56.135) ; J4.6 114.346,51.554 J2.25
  B.Cu w0.25: v1(91.44,56.135) 91.44,56.388 92.964,54.864 95.758,54.864 97.028,53.594 100.33,53.594 101.346,52.578 103.124,52.578 104.394,51.308 109.474,51.308 110.544,50.238 J4.6
brakespeed2: IC9.28 J2.7 J3.1 | length 42.1
  F.Cu w0.25: IC9.28 90.69,55.86 92.452,54.097 v1(95.499,54.097) ; J3.1 102.108,44.259 104.331,46.482 116.373,46.482 J2.7
  B.Cu w0.25: v1(95.499,54.097) 102.108,47.489 J3.1
hallfx1: IC6.20 J2.12 J3.4 | length 23.4
  F.Cu w0.25: IC6.20 109.608,39.559 J3.4 110.908,44.734 112.82,44.734 120.066,37.487 J2.12
hallfx1_3v3: IC6.1 U1.16 | length 68.3
  F.Cu w0.25: v1(100.584,37.084) 100.762,36.906 IC6.1
  B.Cu w0.25: U1.16 44.323,30.734 50.166,30.734 52.624,28.276 56.941,28.276 58.293,26.924 79.511,26.924 88.138,35.551 88.138,35.56 89.662,37.084 v1(100.584,37.084)
hallfx2: IC6.18 J2.31 J3.5 | length 27.1
  F.Cu w0.25: IC6.18 107.599,35.153 v1(108.015,34.736) ; v1(109.029,36.767) 112.108,39.845 J3.5 112.108,42.209 119.313,35.004 J2.31
  B.Cu w0.25: v1(108.015,34.736) 109.029,35.75 v1(109.029,36.767)
hallfx2_3v3: IC6.3 U1.17 | length 69.9
  F.Cu w0.25: IC6.3 101.78,35.153 v1(102.131,34.802)
  B.Cu w0.25: U1.17 42.291,30.226 50.038,30.226 54.528,25.736 56.941,25.736 57.277,25.4 78.994,25.4 88.392,34.798 102.126,34.798 v1(102.131,34.802)
linpot1: IC9.34 J2.4 J4.1 | length 40.1
  F.Cu w0.25: IC9.34 86.602,60.694 87.884,61.976 96.266,61.976 v1(97.282,62.992) ; v1(101.6,63.754) 101.854,63.5 110.998,63.5 111.76,62.738 J4.1 115.778,62.738 J2.4
  B.Cu w0.25: v1(97.282,62.992) 98.044,63.754 v1(101.6,63.754)
linpot2: IC9.33 J2.23 J4.2 | length 42.3
  F.Cu w0.25: IC9.33 87.102,60.432 88.138,61.468 98.806,61.468 v1(99.06,61.722) ; v1(103.886,62.775) 104.103,62.992 110.49,62.992 113.03,60.452 J4.2 116.038,60.238 119.205,57.071 J2.23
  B.Cu w0.25: v1(99.06,61.722) 100.113,62.775 v1(103.886,62.775)
Net-(D1-A): D1.2 U1.LED | length 27.1
  F.Cu w0.25: v1(50.292,20.828) 51.39,21.926 53.422,21.926 54.692,23.196 62.33,23.196 66.693,27.559 D1.2
  B.Cu w0.25: U1.LED 44.836,20.95 45.466,20.32 49.784,20.32 v1(50.292,20.828)
Net-(D1-K): D1.1 R8.1 | length 3
  F.Cu w0.25: D1.1 69.643,27.559 69.755,27.447 R8.1
Net-(D2-A): D2.2 J1.3 J1.4 | length 7
  F.Cu w0.25: J1.4 J1.3 105.998,24.434 D2.2
Net-(D3-A): D3.2 PS1.3 | length 9.3
  F.Cu w0.5: D3.2 71.035,15.748 75.946,15.748 PS1.3
Net-(D4-A): D4.2 IC3.6 | length 4.2
  F.Cu w0.25: IC3.6 68.663,54.991 69.234,55.562 69.234,56.884 D4.2
Net-(D5-A): D5.2 IC7.6 | length 3.8
  F.Cu w0.25: D5.2 99.733,49.669 99.733,50.229 100.558,51.054 IC7.6
Net-(D6-A): D6.2 IC1.7 IC1.8 IC1.12 IC1.13 | length 12.8
  F.Cu w0.25: D6.2 92.968,14.246 IC1.13 IC1.12 ; IC1.7 IC1.8 96.012,9.806 96.012,13.716 96.012,14.224 v1(95.885,14.351)
  B.Cu w0.25: v1(93.057,14.309) 93.099,14.351 v1(95.885,14.351)
Net-(D7-A): D7.2 IC2.7 IC2.8 IC2.12 IC2.13 | length 15.1
  F.Cu w0.25: IC2.7 IC2.8 98.216,54.722 v1(102.108,54.722) ; IC2.12 IC2.13 102.51,57.912 103.504,58.906 103.908,58.906 v1(104.648,58.166)
  B.Cu w0.25: v1(102.108,54.722) 102.108,55.626 v1(104.648,58.166)
Net-(D8-A): D8.2 U1.3.3V_1 | length 5.8
  F.Cu w0.5: U1.3.3V_1 58.89,48.095 D8.2
Net-(IC1-BYPASS): C1.2 IC1.3 | length 2.3
  F.Cu w0.25: IC1.3 92.468,6.859 C1.2
Net-(IC1-NR): C4.2 IC1.5 | length 4.1
  F.Cu w0.25: IC1.5 93.503,8.727 93.503,6.052 C4.2
Net-(IC2-BYPASS): C5.2 IC2.3 | length 2.5
  F.Cu w0.25: C5.2 94.867,58.412 IC2.3
Net-(IC2-NR): C6.2 IC2.5 | length 4
  F.Cu w0.25: C6.2 94.131,57.446 96.992,57.446 IC2.5
Net-(IC4--VS): C20.1 IC4.5 | length 2.6
  F.Cu w0.25: C20.1 65.373,67.564 IC4.5
Net-(IC4-RG_1): IC4.2 R5.1 R6.1 | length 4.5
  F.Cu w0.25: IC4.2 72.144,65.207 R6.1 R5.1
Net-(IC4-RG_2): IC4.3 R5.2 R6.2 | length 4.3
  F.Cu w0.25: IC4.3 72.652,65.857 R6.2 R5.2
Net-(IC5--VS): C13.1 IC5.5 | length 2.7
  F.Cu w0.25: C13.1 95.599,68.58 IC5.5
Net-(IC5-RG_1): IC5.2 R1.1 R2.1 | length 4.4
  F.Cu w0.25: IC5.2 103.386,65.461 R2.1 R1.1
Net-(IC5-RG_2): IC5.3 R1.2 R2.2 | length 4.4
  F.Cu w0.25: IC5.3 103.386,66.111 R2.2 R1.2
Net-(IC8--VS): C18.1 IC8.5 | length 2.5
  F.Cu w0.25: C18.1 80.531,68.154 IC8.5
Net-(IC8-RG_1): IC8.2 R3.1 R4.1 | length 4.3
  F.Cu w0.25: IC8.2 87.892,65.207 R4.1 R3.1
Net-(IC8-RG_2): IC8.3 R3.2 R4.2 | length 4
  F.Cu w0.25: IC8.3 88.4,65.857 R4.2 R3.2
Net-(IC9-REGCAPA): C33.2 C34.2 IC9.7 | length 4.7
  F.Cu w0.25: C33.2 C34.2 81.153,55.133 82.426,53.86 IC9.7
Net-(IC9-REGCAPD): C39.1 C40.1 IC9.22 | length 4.5
  F.Cu w0.25: IC9.22 90.312,52.86 C40.1 C39.1
Net-(T1-RCT): C26.1 C27.1 T1.2 | length 5.8
  F.Cu w0.25: C26.1 C27.1 82.69,36.703 T1.2
Net-(T1-RXCT): R10.1 T1.15 | length 3.4
  F.Cu w0.25: T1.15 93.92,36.576 R10.1
Net-(T1-TCT): C24.1 C25.1 T1.7 | length 6.1
  F.Cu w0.25: C25.1 C24.1 82.787,30.353 T1.7
Net-(T1-TXCT): R9.1 T1.10 | length 2.8
  F.Cu w0.25: T1.10 96.457,30.353 R9.1
potentiometer: IC9.30 J2.6 J4.5 | length 33.3
  F.Cu w0.25: IC9.30 91.858,56.86 93.346,55.372 94.742,55.372 96.52,55.372 97.282,54.61 97.895,53.997 102.408,53.997 102.703,54.292 107.243,54.292 v1(107.945,53.589) ; J4.5 113.225,52.933 J2.6
  B.Cu w0.25: v1(107.945,53.589) 109.987,53.589 110.838,52.738 J4.5
Rd+: T1.1 U1.R+ | length 51.4
  F.Cu w0.2: U1.R+ 44.036,21.041 47.457,21.041 48.036,21.62 48.036,23.698 55.269,30.931 57.093,30.931 v1(57.912,31.75) ; v1(66.556,33.441) 71.723,38.608 v1(76.454,38.608) ; v1(82.804,38.608) 84.388,38.608 T1.1
  B.Cu w0.2: v1(57.912,31.75) 59.473,33.311 61.043,33.311 66.426,33.311 v1(66.556,33.441) ; v1(76.454,38.608) v1(82.804,38.608)
Rd-: T1.3 U1.R- | length 51
  F.Cu w0.2: U1.R- 54.606,36.011 58.363,36.011 61.722,39.37 76.682,39.37 78.232,37.82 v1(78.232,36.322) ; v1(81.103,35.56) 81.23,35.433 T1.3
  B.Cu w0.2: v1(78.232,36.322) 80.341,36.322 v1(81.103,35.56)
Rx+: J2.18 J5.1 T1.16 | length 62.9
  F.Cu w0.2: T1.16 97.155,37.973 v1(97.282,38.1) ; J5.1 101.934,11.129 104.013,13.208 113.442,13.208 J2.18
  B.Cu w0.2: v1(97.282,38.1) 108.966,38.1 110.998,36.068 110.998,34.739 112.583,33.154 113.658,33.154 118.985,27.827 118.985,20.913 J2.18
Rx-: J2.36 J5.2 T1.14 | length 62.8
  F.Cu w0.2: T1.14 94.615,35.433 v1(96.266,33.782) ; J5.2 104.434,11.851 105.283,12.7 114.046,12.7 120.097,18.751 120.605,18.751 122.911,21.057 J2.36 ; v1(117.856,26.924) 120.904,26.924 v1(121.412,26.416)
  B.Cu w0.2: v1(96.266,33.782) 97.536,33.782 102.964,28.354 116.426,28.354 v1(117.856,26.924) ; v1(121.412,26.416) 121.412,22.71 J2.36
SCLK: IC9.16 U1.13 | length 52.8
  F.Cu w0.25: U1.13 41.611,41.066 56.133,41.066 56.215,41.148 73.995,41.148 77.978,45.131 77.978,47.715 v1(79.248,48.985) ; v1(85.608,50.028) 86.102,50.522 IC9.16
  B.Cu w0.25: v1(79.248,48.985) 83.021,48.985 84.064,50.028 v1(85.608,50.028)
SDI: IC9.15 U1.11 | length 54.6
  F.Cu w0.25: v1(51.562,38.608) 52.705,39.751 U1.11 ; v1(82.804,49.821) 84.376,49.821 85.602,51.047 IC9.15
  B.Cu w0.25: v1(51.562,38.608) 51.308,38.608 50.546,39.37 50.546,49.795 51.805,51.054 55.037,51.054 55.119,51.136 75.384,51.136 76.662,52.414 80.211,52.414 v1(82.804,49.821)
SDO: IC9.14 U1.12 | length 42.2
  F.Cu w0.25: U1.12 52.832,45.085 v1(52.832,49.276) 54.692,51.136 64.036,51.136 64.626,50.546 84.464,50.546 85.102,51.184 IC9.14
sg1: IC5.7 IC9.35 | length 19.9
  F.Cu w0.25: IC9.35 86.102,60.956 87.63,62.484 94.375,62.484 94.592,62.701 v1(94.996,62.701) ; IC5.7 98.169,65.461 98.478,65.152 98.478,65.098 v1(99.06,64.516)
  B.Cu w0.25: v1(94.996,62.701) 96.811,64.516 v1(99.06,64.516)
sg1+: IC5.4 J2.1 J7.5 | length 23.4
  F.Cu w0.2: IC5.4 103.599,68.642 v1(108.204,68.642) ; J7.5 116.114,66.726 J2.1
  B.Cu w0.2: v1(108.204,68.642) 108.204,69.636 J7.5
sg1-: IC5.1 J2.20 J7.6 | length 29.1
  F.Cu w0.2: IC5.1 102.575,64.811 103.378,64.008 106.426,64.008 110.503,68.085 v1(110.503,68.593) ; J7.6 117.246,72.136 122.911,66.472 J2.20
  B.Cu w0.2: v1(110.503,68.593) 113.204,71.294 J7.6
sg2: IC8.7 IC9.36 | length 10
  F.Cu w0.25: IC8.7 83.1,65.207 v1(83.511,64.796) ; v1(83.953,62.267) 84.545,62.267 85.344,61.468 85.344,59.173 85.602,58.915 IC9.36
  B.Cu w0.25: v1(83.511,64.796) 83.953,64.354 v1(83.953,62.267)
sg2+: IC8.4 J2.2 J7.3 | length 40.6
  F.Cu w0.2: IC8.4 90.772,70.801 v1(90.932,70.801) ; J7.3 107.609,70.231 111.125,70.231 115.589,65.767 117.856,65.767 119.656,63.967 J2.2
  B.Cu w0.2: v1(90.932,70.801) 93.791,73.66 104.18,73.66 J7.3
sg2-: IC8.1 J2.21 J7.4 | length 49.3
  F.Cu w0.2: IC8.1 87.282,63.753 90.912,63.753 91.694,64.535 91.694,69.088 v1(93.218,70.612) ; v1(96.266,72.898) 97.79,74.422 105.918,74.422 J7.4 109.601,70.739 111.379,70.739 115.951,66.167 118.11,66.167 118.872,65.405 120.997,65.405 122.911,63.491 J2.21
  B.Cu w0.2: v1(93.218,70.612) 95.504,72.898 v1(96.266,72.898)
sg3: IC4.7 IC9.37 | length 24.4
  F.Cu w0.25: IC4.7 67.181,65.207 68.126,64.262 v1(68.834,64.262) ; v1(70.104,61.722) 80.772,61.722 81.534,60.96 v1(81.534,58.674) ; v1(84.84,58.549) 85.102,58.287 IC9.37
  B.Cu w0.25: v1(68.834,64.262) 69.342,63.754 69.342,62.484 v1(70.104,61.722) ; v1(81.534,58.674) 81.721,58.487 84.778,58.487 v1(84.84,58.549)
sg3+: IC4.4 J2.3 J7.1 | length 56.7
  F.Cu w0.2: IC4.4 76.359,72.136 J7.1 100.704,71.254 102.616,69.342 110.744,69.342 115.189,64.897 116.378,64.897 J2.3
sg3-: IC4.1 J2.22 J7.2 | length 65.7
  F.Cu w0.2: IC4.1 71.534,63.753 75.818,63.753 75.946,63.881 75.946,68.707 78.74,71.501 99.187,71.501 v1(100.584,70.104) ; J7.2 105.509,69.831 110.959,69.831 115.423,65.367 117.137,65.367 119.618,62.886 121.01,62.886 122.911,60.985 J2.22
  B.Cu w0.2: v1(100.584,70.104) 101.172,70.104 J7.2
Td+: T1.6 U1.T+ | length 47.8
  F.Cu w0.2: U1.T+ 46.836,25.754 54.413,33.331 57.715,33.331 v1(57.912,33.528) ; v1(82.042,33.274) 83.693,31.623 T1.6
  B.Cu w0.2: v1(57.912,33.528) 58.463,33.528 62.252,37.316 ; 62.246,37.311 62.252,37.316 ; v1(82.042,33.274) 79.896,33.274 74.659,38.511 63.446,38.511 62.252,37.316
Td-: T1.8 U1.T- | length 41.2
  F.Cu w0.2: v1(82.55,27.432) 82.804,27.686 83.626,27.686 T1.8
  B.Cu w0.2: U1.T- 47.036,22.041 53.999,22.041 55.129,23.171 72.447,23.171 73.914,24.638 79.756,24.638 v1(82.55,27.432)
Tx+: J2.19 J5.3 T1.11 | length 53.8
  F.Cu w0.2: T1.11 96.629,31.623 97.284,30.968 97.284,30.242 100.025,27.502 100.654,27.502 v1(100.838,27.686) ; J5.3 106.934,11.176 107.823,12.065 115.057,12.065 J2.19
  B.Cu w0.2: v1(100.838,27.686) 101.022,27.502 109.658,27.502 112.268,24.892 117.094,24.892 117.856,24.13 117.856,19.284 J2.19
Tx-: J2.37 J5.4 T1.9 | length 57.5
  F.Cu w0.2: T1.9 96.206,26.67 v1(103.124,26.67) ; J5.4 111.928,11.176 116.738,11.176 122.911,17.348 J2.37
  B.Cu w0.2: v1(103.124,26.67) 109.728,26.67 112.776,23.622 116.332,23.622 117.094,22.86 117.094,18.288 119.888,15.494 121.056,15.494 122.911,17.348 J2.37
unconnected-(IC1-DNC_1-Pad4): IC1.4
unconnected-(IC1-DNC_2-Pad16): IC1.16
unconnected-(IC1-NC-Pad15): IC1.15
unconnected-(IC2-DNC_1-Pad4): IC2.4
unconnected-(IC2-DNC_2-Pad16): IC2.16
unconnected-(IC2-NC-Pad15): IC2.15
unconnected-(IC3-DNC_1-Pad1): IC3.1
unconnected-(IC3-DNC_2-Pad8): IC3.8
unconnected-(IC3-NC-Pad7): IC3.7
unconnected-(IC3-TEMP-Pad3): IC3.3
unconnected-(IC3-TRIM{slash}NR-Pad5): IC3.5
unconnected-(IC6-A3-Pad4): IC6.4
unconnected-(IC6-A4-Pad5): IC6.5
unconnected-(IC6-A5-Pad6): IC6.6
unconnected-(IC6-A6-Pad7): IC6.7
unconnected-(IC6-A7-Pad8): IC6.8
unconnected-(IC6-A8-Pad9): IC6.9
unconnected-(IC6-B3-Pad17): IC6.17
unconnected-(IC6-B4-Pad16): IC6.16
unconnected-(IC6-B5-Pad15): IC6.15
unconnected-(IC6-B6-Pad14): IC6.14
unconnected-(IC6-B7-Pad13): IC6.13
unconnected-(IC6-B8-Pad12): IC6.12
unconnected-(IC7-DNC_1-Pad1): IC7.1
unconnected-(IC7-DNC_2-Pad8): IC7.8
unconnected-(IC7-NC-Pad7): IC7.7
unconnected-(IC7-TEMP-Pad3): IC7.3
unconnected-(IC7-TRIM{slash}NR-Pad5): IC7.5
unconnected-(IC9-AIN0{slash}REF2--Pad2): IC9.2
unconnected-(IC9-AIN1{slash}REF2+-Pad3): IC9.3
unconnected-(IC9-AIN2-Pad4): IC9.4
unconnected-(IC9-AIN3-Pad5): IC9.5
unconnected-(IC9-AIN4-Pad26): IC9.26
unconnected-(IC9-AIN5-Pad27): IC9.27
unconnected-(IC9-AIN16-Pad1): IC9.1
unconnected-(IC9-GPIO0-Pad23): IC9.23
unconnected-(IC9-GPIO1-Pad24): IC9.24
unconnected-(IC9-GPO2-Pad25): IC9.25
unconnected-(IC9-GPO3-Pad38): IC9.38
unconnected-(IC9-REFOUT-Pad6): IC9.6
unconnected-(IC9-XTAL1-Pad12): IC9.12
unconnected-(IC9-XTAL2{slash}CLKIO-Pad13): IC9.13
unconnected-(J5-Pin_5-Pad5): J5.5
unconnected-(J8-Pin_5-Pad5): J8.5
unconnected-(PS1-NC_1-Pad6): PS1.6
unconnected-(PS1-NC_2-Pad7): PS1.7
unconnected-(T1-NO_CONNECT_1-Pad4): T1.4
unconnected-(T1-NO_CONNECT_2-Pad5): T1.5
unconnected-(T1-NO_CONNECT_3-Pad12): T1.12
unconnected-(T1-NO_CONNECT_4-Pad13): T1.13
unconnected-(U1-3.3V__1-Pad3.3V_2): U1.3.3V_2
unconnected-(U1-3.3V__2-Pad3.3V_3): U1.3.3V_3
unconnected-(U1-A0-Pad14): U1.14
unconnected-(U1-A4-Pad18): U1.18
unconnected-(U1-A5-Pad19): U1.19
unconnected-(U1-A6-Pad20): U1.20
unconnected-(U1-A7-Pad21): U1.21
unconnected-(U1-A8-Pad22): U1.22
unconnected-(U1-A9-Pad23): U1.23
unconnected-(U1-A10-Pad24): U1.24
unconnected-(U1-A11-Pad25): U1.25
unconnected-(U1-A12-Pad26): U1.26
unconnected-(U1-A13-Pad27): U1.27
unconnected-(U1-A14-Pad38): U1.38
unconnected-(U1-A15-Pad39): U1.39
unconnected-(U1-A16-Pad40): U1.40
unconnected-(U1-A17-Pad41): U1.41
unconnected-(U1-BCLK2-Pad4): U1.4
unconnected-(U1-CRX3-Pad30): U1.30
unconnected-(U1-CS2-Pad36): U1.36
unconnected-(U1-CS3-Pad37): U1.37
unconnected-(U1-CTX3-Pad31): U1.31
unconnected-(U1-IN2-Pad5): U1.5
unconnected-(U1-LRCLK2-Pad3): U1.3
unconnected-(U1-MCLK2-Pad33): U1.33
unconnected-(U1-OUT1B-Pad32): U1.32
unconnected-(U1-OUT1C-Pad9): U1.9
unconnected-(U1-OUT2-Pad2): U1.2
unconnected-(U1-Pad5V): U1.5V
unconnected-(U1-PadON{slash}OFF): U1.ON/OFF
unconnected-(U1-PadPROGRAM): U1.PROGRAM
unconnected-(U1-PadVBAT): U1.VBAT
unconnected-(U1-PadVUSB): U1.VUSB
unconnected-(U1-RX1-Pad0): U1.0
unconnected-(U1-RX2-Pad7): U1.7
unconnected-(U1-RX7-Pad28): U1.28
unconnected-(U1-RX8-Pad34): U1.34
unconnected-(U1-TX1-Pad1): U1.1
unconnected-(U1-TX2-Pad8): U1.8
unconnected-(U1-TX7-Pad29): U1.29
unconnected-(U1-TX8-Pad35): U1.35
usb_d+: J2.34 J8.2 U1.D+ | length 82.7
  F.Cu w0.2: U1.D+ 71.24,20.701 74.866,24.327 96.971,24.327 v1(98.044,25.4) ; J8.2 109.22,15.748 110.744,17.272 113.031,17.272 119.889,24.13 120.523,24.13 122.911,26.518 J2.34
  B.Cu w0.2: v1(98.044,25.4) 98.044,24.228 102.973,19.299 104.907,19.299 J8.2
usb_d-: J2.16 J8.3 U1.D- | length 75.7
  F.Cu w0.2: J8.3 111.033,19.299 114.016,19.299 J2.16 J2.16@119.583,25.349
  B.Cu w0.2: U1.D- 92.101,18.161 94.661,20.721 100.985,20.721 J8.3
usb_gnd: C1.1 C2.1 C3.1 C4.1 C5.1 C6.1 C7.1 C8.1 C9.2 C10.2 C11.2 C12.2 C13.2 C14.2 C15.2 C16.2 C17.2 C18.2 C19.2 C20.2 C21.2 C22.1 C23.1 C24.2 C25.2 C26.2 C27.2 C31.2 C32.2 C33.1 C34.1 C35.2 C36.2 C37.2 C38.2 C39.2 C40.2 IC1.1 IC1.2 IC1.6 IC1.17 IC2.1 IC2.2 IC2.6 IC2.17 IC3.4 IC6.11 IC7.4 IC9.8 IC9.11 IC9.19 IC9.21 IC9.39 IC9.41 J1.1 J1.2 J2.9 J2.10 J2.11 J2.15 J2.26 J2.27 J2.28 J2.29 J2.30 J2.35 J2.MH1 J2.MH2 J3.2 J6.1 J8.4 PS1.1 PS1.5 R8.2 R9.2 R10.2 U1.6 U1.GND1 U1.GND2 U1.GND3 U1.GND4 U1.GND5 U1.USB_GND1 U1.USB_GND2 | length 190
  F.Cu w0.25: C10.2 62.37,54.089 IC3.4 64.389,52.07 v1(65.716,52.07) 68.383,52.07 70.021,53.708 C11.2 ; C21.2 61.341,65.646 v1(61.341,66.294) 61.455,66.294 C20.2 ; v1(66.929,24.003) 68.105,25.179 R8.2 ; PS1.1 73.188,21.659 v1(73.271,21.742) ; v1(74.676,30.734) 74.676,30.861 76.283,29.254 C22.1 76.283,26.227 C23.1 ; C19.2 78.727,66.307 v1(78.105,66.929) 78.981,67.805 C18.2 ; 79.834,37.465 C27.2 ; 79.883,39.878 C26.2 C27.2 ; C24.2 C25.2 80.251,34.43 v1(80.01,34.671) 80.378,35.039 C27.2 ; C34.1 C33.1 78.753,56.909 v1(77.597,55.753) 77.597,54.496 C31.2 78.688,53.405 84.647,53.405 IC9.41 ; v1(81.653,20.599) 81.145,21.107 C9.2 80.079,19.7 PS1.5 ; IC9.11 83.647,51.705 83.647,52.405 IC9.41 ; IC9.39 84.102,61.072 C35.2 84.087,56.375 IC9.41 ; C35.2@84.147,60.893 C35.2@84.341,61.087 ; C38.2 88.618,50.038 87.602,51.054 IC9.19 87.602,52.86 IC9.41 ; C37.2 C38.2@88.9,49.657 ; C1.1 91.173,8.467 IC1.1 IC1.2 91.968,9.672 IC1.17 93.968,10.172 IC1.6 93.968,7.137 C4.1 95.39,6.617 v1(96.012,7.239) ; C3.1 92.443,19.063 v1(93.218,18.288) 93.459,18.047 C2.1 ; C39.2 C40.2 89.486,51.676 IC9.21 88.757,52.405 88.057,52.405 IC9.41 ; C14.2 93.967,66.18 v1(92.837,67.31) 92.837,68.072 93.345,68.58 C13.2 ; C5.1 96.223,60.215 IC2.1 IC2.2 97.936,58.912 IC2.17 ; C6.1 95.147,56.912 IC2.6 98.436,56.912 IC2.17 ; R9.2 98.234,31.306 v1(97.028,32.512) 97.028,34.862 R10.2 ; C12.2 98.806,31.138 100.353,29.591 v1(103.378,29.591) 104.39,30.603 IC6.11 107.287,30.603 109.347,32.663 C17.2 ; C15.2 99.444,52.949 99.444,53.089 99.695,53.34 103.378,53.34 v1(103.505,53.467) 104.648,52.324 IC7.4 106.851,51.956 C16.2 ; C8.1 107.327,56.79 106.163,55.626 v1(105.029,55.626) 105.02,55.617 C7.1 103.334,55.447 99.729,55.447 99.186,55.989 IC2.17 ; J6.1 114.088,28.108 J2.15
  B.Cu w0.25: U1.GND5 46.503,25.908 48.26,25.908 48.387,25.781 U1.USB_GND2
wheelspeed1: IC9.32 J2.5 J4.3 | length 37.6
  F.Cu w0.25: IC9.32 87.602,60.17 88.422,60.99 98.014,60.99 98.858,60.146 v1(100.565,60.146) ; v1(108.204,59.182) 111.586,59.182 J4.3 115.617,57.738 117.663,55.692 J2.5
  B.Cu w0.25: v1(100.565,60.146) 100.766,59.944 104.902,59.944 105.664,59.182 v1(108.204,59.182)
wheelspeed2: IC9.31 J2.24 J4.4 | length 38.8
  F.Cu w0.25: IC9.31 88.609,58.067 v1(93.624,58.067) ; J4.4 113.955,54.313 J2.24
  B.Cu w0.25: v1(93.624,58.067) 95.095,58.067 95.504,57.658 95.504,55.88 96.266,55.118 100.584,55.118 101.854,53.848 102.861,53.848 103.623,54.61 109.22,54.61 109.848,55.238 J4.4

## Polygon pours and split planes (outlines as drawn)
usb_gnd on In1.Cu "In1.Cu-usb_gnd" (solid, remove dead copper, pour order 0): 34.544,83.058 132.842,83.058 133.35,82.55 133.35,0.508 35.052,0.508 34.798,1.524 35.052,52.07
12v on In2.Cu "In2.Cu-12v" (solid, remove dead copper, pour order 2): 131.572,81.026 131.826,80.772 131.826,24.13 83.146,24.13 82.042,25.234 82.042,39.252 84.074,41.284 84.074,59.182 83.566,59.69 57.912,59.69 57.15,59.436 57.15,81.026
5v_buck on In2.Cu "In2.Cu-5v_buck" (solid, remove dead copper, pour order 1): 57.15,81.165 57.15,59.69 84.074,59.182 84.074,41.284 82.57,34.914 82.042,25.234 93.494,25.34 97.496,25.015 133.35,24.1 134.366,13.97 133.35,0 71.374,0.762 72.667,0.372 35.052,1.342 35.306,81.28

## Keep-outs
Edge.Cuts:
  lines w0: 35,2.026 131.5,2.026 131.5,81.026 35,81.026 35,2.026
  lines w0.254: 35,2.026 131.5,2.026 131.5,81.026 35,81.026 35,2.026

## Silkscreen, mask and mechanical layers (free items; w line width, h text height)
F.SilkS:
  lines w0.254: 66.802,28.956 69.342,28.956 ; 70.358,17.78 67.818,17.78 ; 71.12,58.166 71.12,55.626 ; 100.076,48.26 100.076,50.8 ; 105.41,23.368 102.87,23.368 ; 67.818,17.78 68.072,17.526 68.072,18.034 67.818,17.78 ; 69.342,28.956 69.088,28.702 69.088,29.21 69.342,28.956 ; 71.12,55.626 70.866,55.88 71.374,55.88 71.12,55.626 ; 100.076,50.8 99.822,50.546 100.33,50.546 100.076,50.8 ; 102.87,23.368 103.124,23.114 103.124,23.622 102.87,23.368
  text "BJR @JHU 21xt Accessory V1" at 39.116,75.311 h1

## Text inside footprints (layer, text, board x,y; h text height)
U1: F.Fab "Teensy 4.1" at 48.047,37.009 h1 r90